# Altium PCB AdControl.PcbDoc
Units mil, origin at the board's own origin, x right, y up, seen from the top; angles counter-clockwise.
Board outline 1725 x 1850 mil, 2 copper layers (Top Layer, Bottom Layer); 49 components, 33 nets, 189 pads, 84 vias.
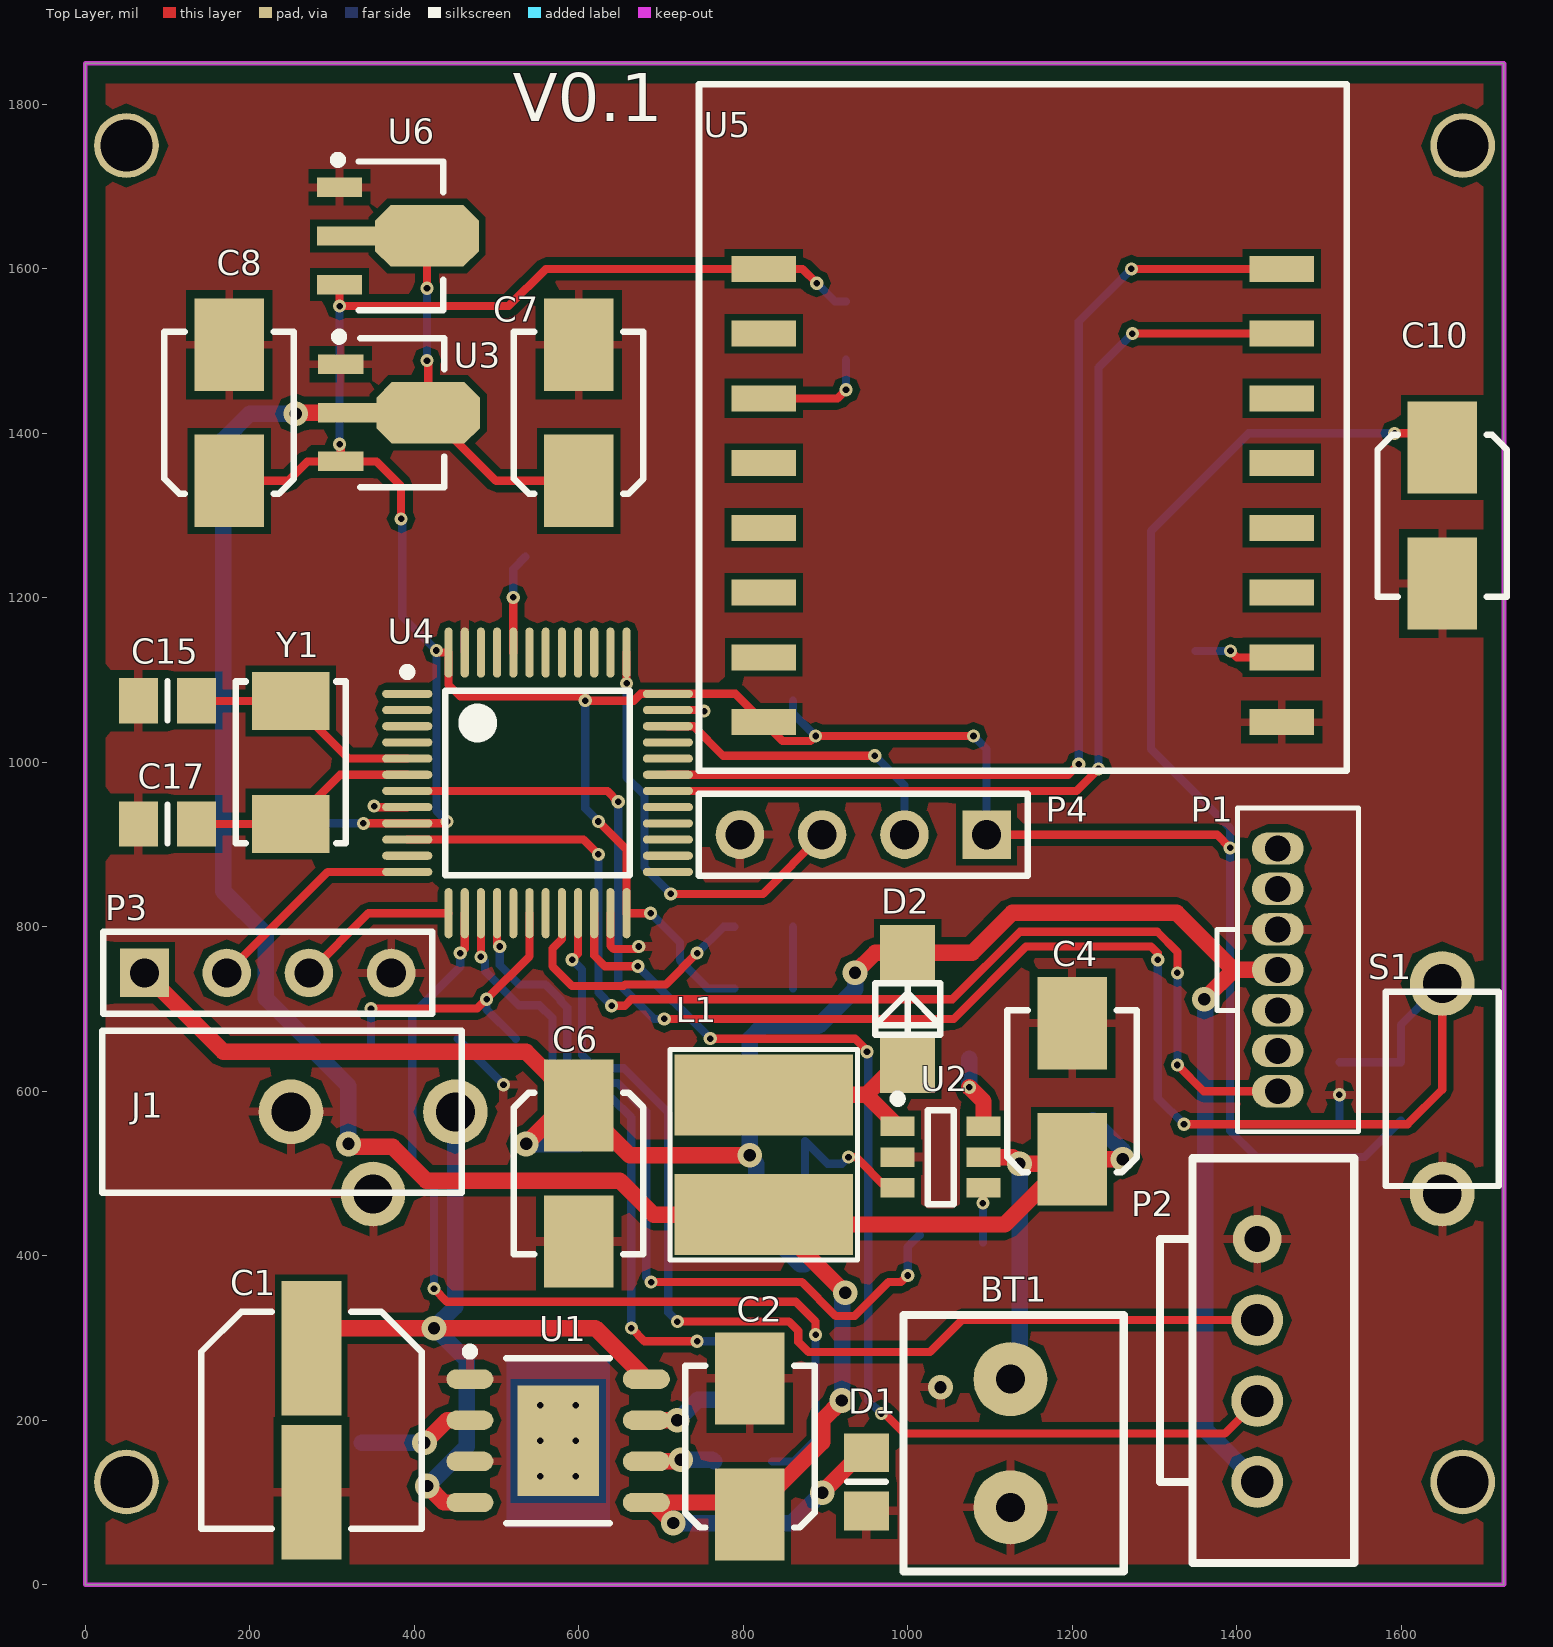
[diagram p0: Top Layer view]
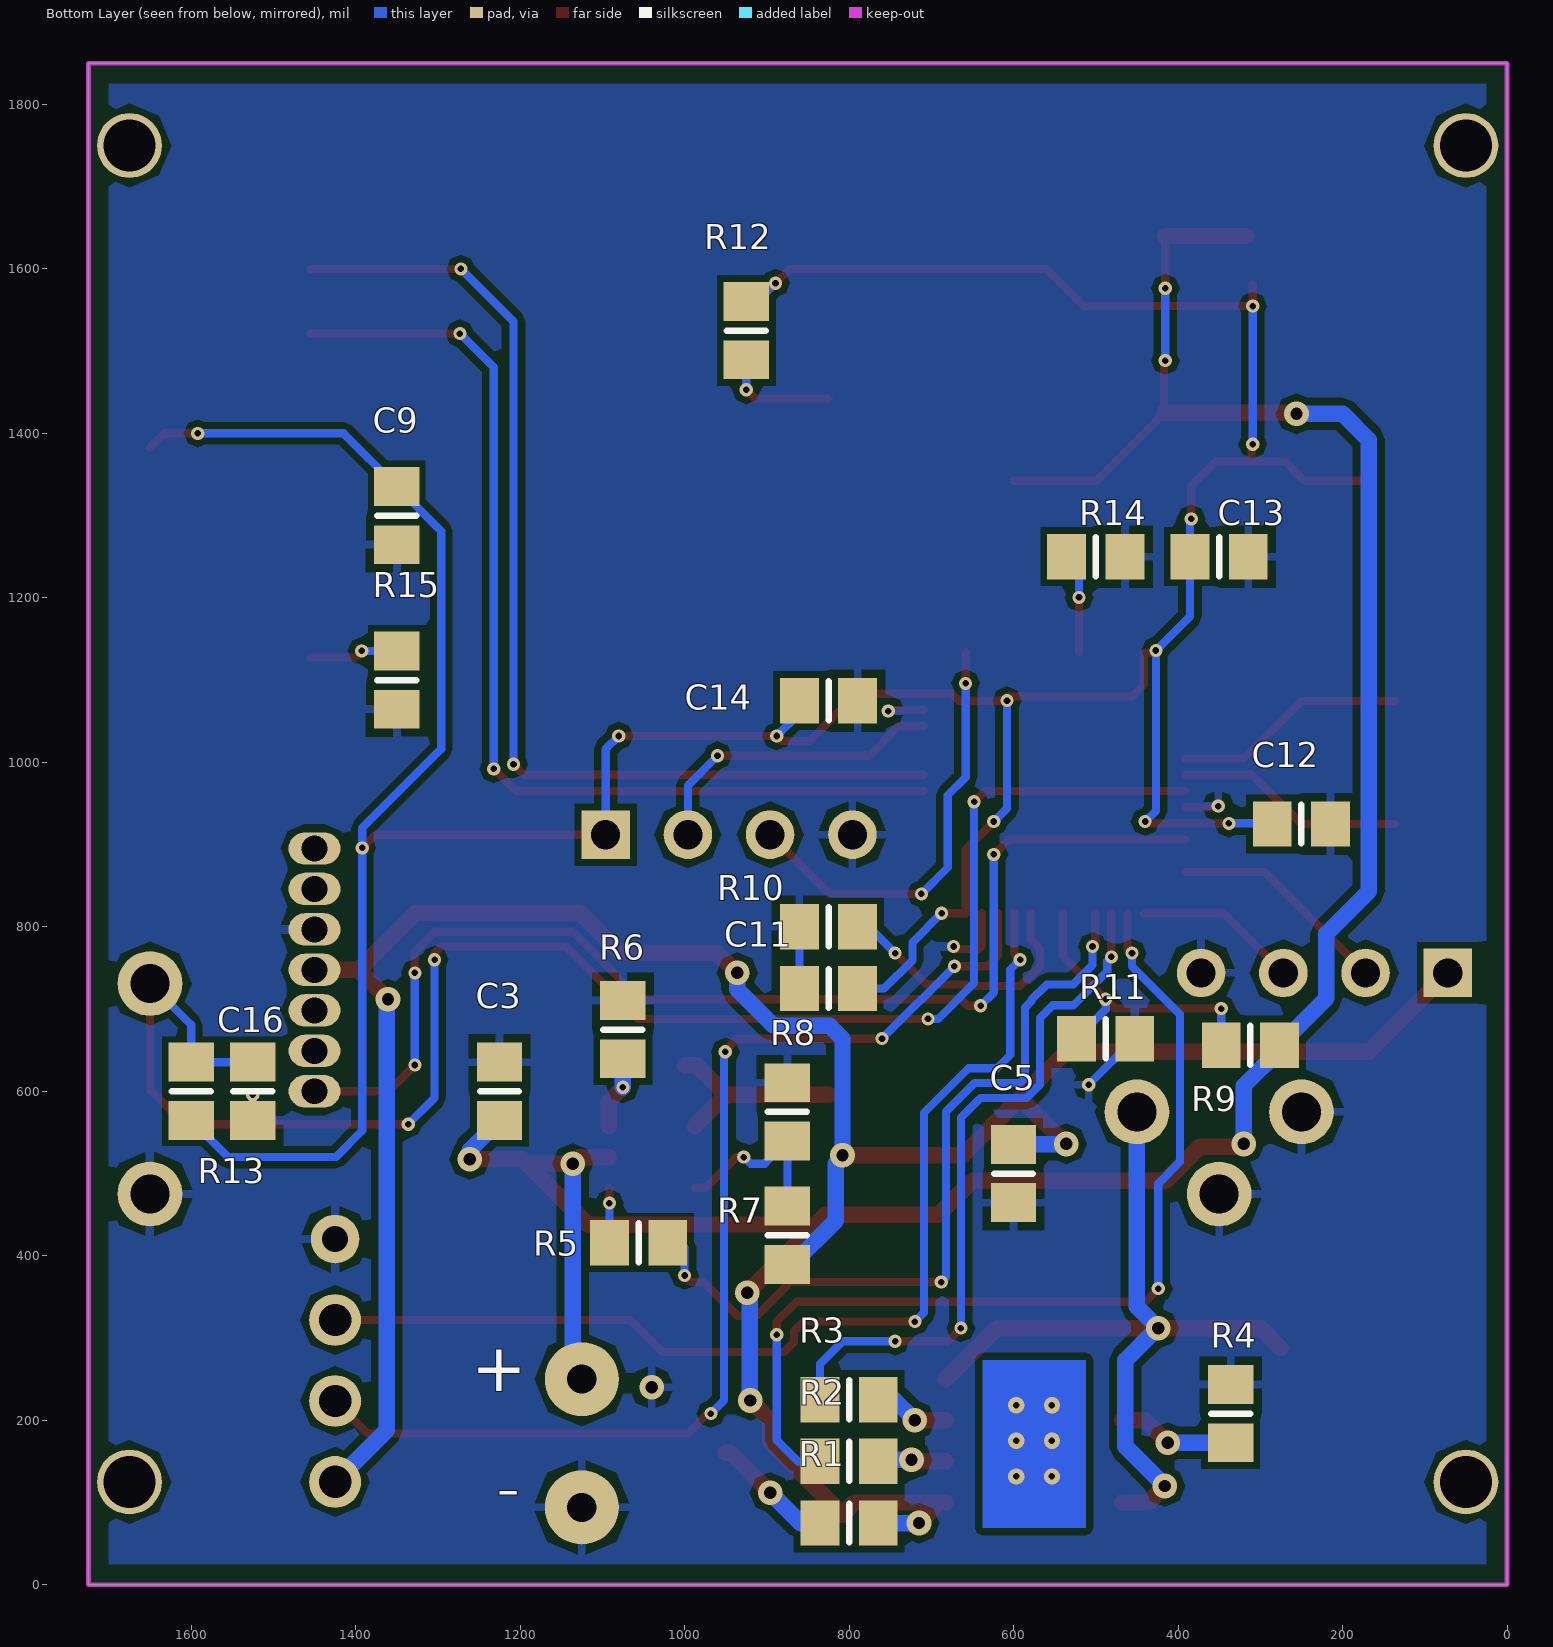
[diagram p1: Bottom Layer view, seen from below]

## Layer stack, top to bottom
Top Solder: solder mask 0.4, Solder Resist, Dk 3.5
Top Layer: signal copper 1.4
Dielectric 1: dielectric 12.6, FR-4, Dk 4.8
Bottom Layer: signal copper 1.4
Bottom Solder: solder mask 0.4, Solder Resist, Dk 3.5

## Board outline
0,0 0,1850 1725,1850 1725,0

## Design rules (kind name [scope] priority, off if disabled: settings)
Clearance [All] p1: gap=8
MinimumSolderMaskSliver [All] p1: minsoldermaskwidth=0
PolygonConnect [All] p1: connectstyle=Relief reliefconductorwidth=10 reliefentries=4 polygonreliefangle="90 Angle" airgapwidth=10
RoutingVias [All] p1: holewidth=8 width=8 viastyle="Through Hole" minholewidth=8 minwidth=15 maxholewidth=100 maxwidth=1000
SilkToSilkClearance [All] p1: silktosilkclearance=0
SilkToSolderMaskClearance [IsPad] p1: minsilkscreentomaskgap=0 clearancetoexposedcopper=TRUE
SolderMaskExpansion [All] p1: expansion=4
UnpouredPolygon [All] p1: allowunpoured=FALSE
Width [All] p1: maxlimit=1000 minlimit=8 preferedwidth=8
26 further rules are at their usual default settings.

## Components (designator, comment, footprint, x,y, rotation, side; value= is the part's Value field where it differs from the comment)
BT1 "Battery" KF3.96_2P 1125,250 r0 top
C1 "Cap Pol1" CAP_6.3*5.4MM 275,200 r270 top
C2 "Cap Pol1" Cap_5*4mm 808,168 r90 top
C3 "Cap Semi" 6-0805_N 1225,600 r90 bottom
C4 "Cap Pol1" Cap_5*4mm 1200,600 r90 top
C5 "Cap Semi" 6-0805_N 600,500 r270 bottom
C6 "Cap Pol1" Cap_5*4mm 600,500 r270 top
C7 "Cap Pol1" Cap_5*4mm 600,1425 r90 top
C8 "Cap Pol1" Cap_5*4mm 175,1425 r90 top
C9 "Cap Semi" 6-0805_N 1350,1300 r270 bottom
C10 "Cap Pol1" Cap_5*4mm 1650,1300 r270 top
C11 "Cap Semi" 6-0805_N 825,725 r0 bottom
C12 "Cap Semi" 6-0805_N 250,925 r180 bottom
C13 "Cap Semi" 6-0805_N 350,1250 r180 bottom
C14 "Cap Semi" 6-0805_N 825,1075 r180 bottom
C15 "Cap Semi" 6-0805_N 100,1075 r180 top
C16 "Cap Semi" 6-0805_N 1525,600 r90 bottom
C17 "Cap Semi" 6-0805_N 100,925 r180 top
D1 "PWR" 6-0805_N 950,125 r270 top
D2 "Diode US1M" US1M 1000,700 r90 top
J1 "PWR2.5" KLD-3.5-1.3mm 450,575 r0 top
L1 "Inductor Iron CD45" CD54_Inductor 825,450 r90 top
P1 "CO2 MH-Z14A" 1.25Connector 1450,600 r90 top
P2 "HIM" XH2.54-4P 1425,125 r90 top
P3 "UART_Debug_Port" HDR1X4 72,744 r0 top
P4 "Debug_Port" HDR1X4 1096,912 r180 top
R1 "Res3" 6-0805_N 800,75 r0 bottom
R2 "Res3" 6-0805_N 800,150 r0 bottom
R3 "Res3" 6-0805_N 800,225 r0 bottom
R4 "Res3" 6-0805_N 336,208 r90 bottom
R5 "Res3" 6-0805_N 1056,416 r0 bottom
R6 "Res3" 6-0805_N 1075,675 r90 bottom
R7 "Res3" 6-0805_N 875,425 r90 bottom
R8 "Res3" 6-0805_N 875,575 r90 bottom
R9 "Res3" 6-0805_N 312,656 r0 bottom
R10 "Res3" 6-0805_N 825,800 r0 bottom
R11 "Res3" 6-0805_N 488,664 r180 bottom
R12 "Res3" 6-0805_N 925,1525 r90 bottom
R13 "Res3" 6-0805_N 1600,600 r90 bottom
R14 "Res3" 6-0805_N 500,1250 r180 bottom
R15 "Res3" 6-0805_N 1350,1100 r270 bottom
S1 "Reset" SWP_PB_6.5mm 1650,475 r90 top
U1 "TP4056" Power_SOP8 575,175 r0 top
U2 "FP6291" SOT23-6L 1040,520 r0 top
U3 "HT7333-SOT89" SOT89_N 385.43,1425 r0 top
U4 "STM32F103C8T6" STM-LQFP48_L 550,975 r0 top
U5 "ESP-07" ESP-07_Wifi 825,1600 r0 top
U6 "HT7333-SOT89" SOT89_N 384,1640 r0 top
Y1 "XTAL" OSC_5032_2Pin 250,925 r90 top

## Footprints (in the part's own frame and the unit in brackets; to place one, negate y for a bottom-side part, rotate by r counter-clockwise, add the part's x,y. Pads: shape width x height; smd on the part's side, far side on the other; paste and mask are expansions set on the pad)
1.25Connector [mm]
  oval 1x1.6 hole 0.8: 1(0,0) 2(1.25,0) 3(2.5,0) 4(3.75,0) 5(5,0) 6(6.25,0) 7(7.5,0)
  silkscreen extent -1.25,-2.5 8.75,1.88
6-0805_N [mm] "Chip Resistor, Body 2.0x1.2mm, IPC Medium Density"
  rect 1.2x1.4 smd: 1(-0.9,0) 2(0.9,0)
  silkscreen extent 0,-0.6 0,0.6, body extent -1.07,-0.7 1.07,0.7, height 0.7
Cap_5*4mm [mm]
  rect 2.85x2.15 smd: 1(-2.1,0) 2(2.1,0)
  silkscreen extent -2.5,-2 2.5,2, body extent -2.5,-2 2.5,2, height 6
CAP_6.3*5.4MM [mm] "Aluminum Electrolytic Capacitor, Body 6.50x6.60x5.40mm, IPC Low Density"
  rect 4.15x1.85 smd: 1(-2.225,0) 2(2.225,0)
  silkscreen extent -3.35,-3.4 3.35,3.4, body extent -3.35,-3.4 3.35,3.4, height 5.4
CD54_Inductor [mm] "CD54 Inductor"
  rect 2.5x5.5 smd: 1(0,0) 2(3.7,0)
  silkscreen extent -1.4,-2.9 5.1,2.9
ESP-07_Wifi [mm]
  rect 2x0.8 smd: 1(0,0) 2(0,-2) 3(0,-4) 4(0,-6) 5(0,-8) 6(0,-10) 7(0,-12) 8(0,-14) 9(16,-14) 10(16,-12) 11(16,-10) 12(16,-8) 13(16,-6) 14(16,-4) 15(16,-2) 16(16,0)
  silkscreen extent -2,-15.5 18,5.7
HDR1X4 [mm] "Connector; Header; 4 Position"
  rect 1.5x1.5 hole 0.9: 1(0,0)
  round 1.5 hole 0.9: 2(2.54,0) 3(5.08,0) 4(7.62,0)
  silkscreen extent -1.27,-1.27 8.89,1.27
KF3.96_2P [mil]
  round 90 hole 35.43: 1(0,0) 2(0,-155.91)
  silkscreen extent -130,-234 138,78
KLD-3.5-1.3mm [mm]
  round 2 hole 1.2: 1(0,0) 2(-5.08,0) 3(-2.54,-2.54)
  silkscreen extent -10.9,-2.5 0.2,2.5
OSC_5032_2Pin [mm]
  rect 1.8x2.4 smd: 1(0,0) 2(3.8,0)
  silkscreen extent -0.6,-1.7 4.4,1.7
Power_SOP8 [mm] "SOP, 8-Leads, Body 4.90x3.90mm, Pitch 1.27mm, Thermal Pad 3.41x2.52mm, IPC Medium Density"
  oval 1.45x0.6 smd: 1(-2.725,1.905) 2(-2.725,0.635) 3(-2.725,-0.635) 4(-2.725,-1.905) 5(2.725,-1.905) 6(2.725,-0.635) 7(2.725,0.635) 8(2.725,1.905)
  rect 2.52x3.41 smd: 9(0,0)
  Bottom Layer region: -1.6,-2.7 1.6,-2.7 1.6,2.5 -1.6,2.5
  silkscreen extent -2.85,-2.55 1.6,2.88, body extent -2,-2.55 2,2.55, height 1.75
SOT23-6L [mm] "SOT23, 6-Leads, Body 2.90x2.80mm, Pitch 0.95mm, IPC Medium Density"
  rect 1.05x0.6 smd: 1(-1.325,0.95) 2(-1.325,0) 3(-1.325,-0.95) 4(1.325,-0.95) 5(1.325,0) 6(1.325,0.95)
  silkscreen extent -1.45,-1.45 0.4,1.92, body extent -0.8,-1.45 0.8,1.45, height 1.45
SOT89_N [mm] "SOT89, 3-Leads, Body 4.5x2.4 mm, Pitch 1.5mm, Lead Span 4.1mm, IPC Medium Density"
  rect 1.4x0.6 smd: 1(-1.9,1.5) 3(-1.9,-1.5)
  rect 1.8x0.6 smd: 2(-1.7,0)
  oct 3.2x1.9 smd: 2(0.8,0)
  silkscreen extent -2.07,-2.3 1.3,2.47, body extent -1.3,-2.3 1.29,2.3, height 1.6
STM-LQFP48_L [mm] "QFP, 48-Leads, Body 7x7mm, Pitch 0.5mm, IPC High Density"
  oval 1.55x0.25 smd: 1(-4.025,2.75) 2(-4.025,2.25) 3(-4.025,1.75) 4(-4.025,1.25) 5(-4.025,0.75) 6(-4.025,0.25) 7(-4.025,-0.25) 8(-4.025,-0.75) 9(-4.025,-1.25) 10(-4.025,-1.75) 11(-4.025,-2.25) 12(-4.025,-2.75) 25(4.025,-2.75) 26(4.025,-2.25) 27(4.025,-1.75) 28(4.025,-1.25) 29(4.025,-0.75) 30(4.025,-0.25) 31(4.025,0.25) 32(4.025,0.75) 33(4.025,1.25) 34(4.025,1.75) 35(4.025,2.25) 36(4.025,2.75)
  oval 0.25x1.55 smd: 13(-2.75,-4.025) 14(-2.25,-4.025) 15(-1.75,-4.025) 16(-1.25,-4.025) 17(-0.75,-4.025) 18(-0.25,-4.025) 19(0.25,-4.025) 20(0.75,-4.025) 21(1.25,-4.025) 22(1.75,-4.025) 23(2.25,-4.025) 24(2.75,-4.025) 37(2.75,4.025) 38(2.25,4.025) 39(1.75,4.025) 40(1.25,4.025) 41(0.75,4.025) 42(0.25,4.025) 43(-0.25,4.025) 44(-0.75,4.025) 45(-1.25,4.025) 46(-1.75,4.025) 47(-2.25,4.025) 48(-2.75,4.025)
  silkscreen extent -4.15,-2.85 2.85,3.55, body extent -3.5,-3.5 3.5,3.5, height 1.6
SWP_PB_6.5mm [mm]
  round 2 hole 1.2: 1(0,0) 2(6.5,0)
  silkscreen extent 0.25,-1.75 6.25,1.75
US1M [mm]
  rect 1.7x1.7 smd: 1(-1.74,0) 2(1.74,0)
  silkscreen extent -0.8,-1 0.8,1
XH2.54-4P [mm]
  round 1.6 hole 1: 1(0,0) 2(2.5,0) 3(5,0)
  round 1.5 hole 0.8: 4(7.5,0)
  silkscreen extent -2.5,-3 10,3

## Part data
BT1: "Multicell Battery"
C1 C2 C4 C6 C7 C8 C10: "Polarized Capacitor (Radial)"
C3 C5 C9 C11 C12 C13 C14 C15 C16 C17: "Capacitor (Semiconductor SIM Model)"
D1: library part LED0, "Typical INFRARED GaAs LED"
D2: library part "Diode BAT17", "Silicon RF Schottky Diode for Mixer Applications in the VHF/UHF Range"
J1: "Low Voltage Power Supply Connector"
L1: library part "Inductor Iron", "Magnetic-Core Inductor"
P1: library part "Header 7", "Header, 7-Pin"
P2: library part XH2.54-4P
P3 P4: library part "Header 4", "Header, 4-Pin"
R1 R2 R3 R4 R5 R6 R7 R8 R9 R10 R11 R12 R13 R14 R15: "Resistor"
S1: library part SW-PB, "Switch"
U3 U6: library part CMP-0204-00157-1, "Low Power Consumption LDO, Output Voltage 3.3V, SOT89 Pkg"
U4: library part CMP-0237-00215-3, "ARM Cortex-M3 32-bit MCU, 64 KB Flash, 20 KB Internal RAM, 37 I/Os, 48-pin LQFP, -40 to 85 degC, Tray"
U5: library part ESP-07_Wifi
Y1: "Crystal Oscillator"

## Free pads (board coordinates)
  round 78.74 hole 62.99: 0(50,125) 0(50,1750) 0(1675,125) 0(1675,1750)

## Via types
v1: diameter 16, hole 8, Top Layer to Bottom Layer, tented both sides, 60 vias
v2: diameter 30, hole 15, Top Layer to Bottom Layer, tented both sides, 18 vias
v3: diameter 19.68, hole 7.87, Top Layer to Bottom Layer, tented both sides, 6 vias

## Nets (pads, with @x,y where several pads share a name; then routed paths per layer and width w, separated by ;. In a path a pad name is that pad's centre, name@x,y a point inside that pad or via, vN(x,y) a via of type N, cw(c..) or ccw(c..) an arc to the next point about the centre after c; other vN are vias at no path point)
+3.3V: C8.1 C9.1 C10.1 C11.1 C12.1 C13.1 C14.1 P4.1 R12.2 R13.1 U3.3 U4.9 U4.24 U4.36 U4.48 U5.1 U5.8 U6.3 | length 4772.6
  Top Layer w10: C8.1 246.32,1342.32 269.94,1365.94 U3.3 ; v1(309.2,1386.8) 310.63,1385.37 U3.3 ; U6.3 v1(309.2,1554.8) 514.8,1554.8 560,1600 U5.1 872,1600 v1(889.44,1582.56) ; v1(338.21,925.79) U4.9 437.79,925.79 v1(440,928) ; v1(384,1296) 384,1336 354.06,1365.94 U3.3 ; v1(426.93,1136) 429.46,1133.46 U4.48 441.73,1094.27 456,1080 v1@608,1080 ; v1@613,1075 666.97,1075 675.23,1083.27 U4.36 790.55,1083.27 U5.8 847.82,1026 882,1026 v1(888,1032) v1(1080,1032) ; v1(624,928) 658.27,893.73 U4.24 v1(687.46,816.54) ; P4.1 1376,912 v1(1392,896) ; v1(1592,1400) 1632.68,1400 C10.1
  Bottom Layer w10: C12.1 286.22,925.79 v1(338.21,925.79) ; v1(309.2,1386.8) v1(309.2,1554.8) ; v1(384,1296) 385.43,1294.57 C13.1 385.43,1177.5 v1(426.93,1136) 426.93,941.07 v1(440,928) ; v1(608,1075) 608,944 v1(624,928) ; v1(687.46,816.54) 723,781 723,759.3 757.3,725 C11.1 ; C14.1 860.43,1059.57 v1(888,1032) ; v1(889.44,1582.56) 911.57,1560.43 R12.2 ; v1(1080,1032) 1096,1016 P4.1 ; v1(1592,1400) 1414.57,1400 C9.1 1296,1281.43 1296,1016 1392,920 v1(1392,896) 1392,552 1424,520 1555.43,520 R13.1
+5V: C5.1 C6.1 D2.2 P1.4 P2.1 P3.1 R7.1 | length 2673.2
  Top Layer w20: P3.1 168,648 536,648 C6.1@592,592 ; v2(536,536) C6.1@592,592 ; v2(808,522.21) 661.79,522.21 C6.1@592,592 ; v2(936,744) 960.5,768.5 D2.2 1078.52,768.5 1127.02,817 1327,817 1396.36,747.64 ; v2(1360.72,712) 1396.36,747.64 ; P1.4 1396.36,747.64
  Bottom Layer w20: v2(536,536) 536.57,535.43 C5.1 ; v2(808,522.21) 808,664 823.44,679.44 891.51,679.44 936,723.93 v2(936,744) ; v2@816,512 816,442.8 869.23,389.57 R7.1 ; v2(1360.72,712) 1362,710.72 1362,188 P2.1
+5V_IN: C1.1 J1.1 U1.4 U1.8 | length 1005.9
  Top Layer w20: C1.1 299.4,312 v2(424,312) 620.28,312 U1.8 ; v2(416,120) 436,100 U1.4
  Bottom Layer w20: v2(416,120) 464,168 464,273.07 425.07,312 v2(424,312) 450,338 J1.1
C\H\R\G\: R3.2 U4.15 | length 860.7
  Top Layer w10: v1(481.1,763.4) U4.15 ; v1(664,312) 680,296 v1(744,296)
  Bottom Layer w10: v1(481.1,763.4) 486,758.51 486,746 527.44,704.56 552.44,704.56 568,689 568,608 584,592 640,592 664,568 v1(664,312) ; v1(744,296) 808,296 835.43,268.57 R3.2
CO2PWM: P1.1 U4.10 | length 1438.7
  Top Layer w10: U4.10 605.9,906.1 v1(624,888) ; v1(640,704) 656,704 664,712 1054.54,712 1136.54,794 1303.46,794 1328,769.46 v1(1328,744) ; v1(1328,632) 1360,600 P1.1
  Bottom Layer w10: v1(624,888) 624,720 v1(640,704) ; v1(1328,632) v1(1328,744)
DEBUG_RX: P3.3 U4.13 | length 199.8
  Top Layer w10: P3.3 344.54,816.54 U4.13
DEBUG_TX: P3.2 U4.12 | length 270.4
  Top Layer w10: P3.2 294.73,866.73 U4.12
FP6291EN: R5.1 U4.16 | length 981.7
  Top Layer w10: U4.16 500.79,779.21 v1(504,776) ; v1(688,368) 871.26,368 912.4,326.86 935.6,326.86 976.74,368 992,368 v1(1000,376)
  Bottom Layer w10: v1(504,776) 504,753.46 527.46,730 559.46,730 578.06,711.4 578.06,709.94 586,702 586,616 592,610 647.46,610 682,575.46 682,374 v1(688,368) ; v1(1000,376) 1000,410.43 R5.1@1014.57,425
GND: BT1.2 C1.2 C2.2 C3.2 C4.2 C5.2 C6.2 C7.2 C8.2 C9.2 C10.2 C11.2 C12.2 C13.2 C14.2 C15.2 C16.1 C17.2 D1.2 J1.2 J1.3 P1.5 P2.4 P3.4 P4.4 R4.2 R6.2 R8.2 R10.2 R11.2 R14.2 R15.2 S1.1 U1.1 U1.3 U2.2 U3.1 U4.8 U4.23 U4.35 U4.47 U5.9 U6.1 | length 349.6
  Top Layer w10: v1(351.15,946.79) 352.47,945.47 U4.8 ; U4.23 638.58,776.91 642.47,773.02 669.93,773.02 v1(672.91,776) ; U4.35 751.1,1063.58 v1(752.42,1062.27)
  Bottom Layer w10: v1@349.21,946.79 v1(351.15,946.79) ; R11.2 v1(508.57,608) ; C11.2 R10.2 ; C16.1 v1(1525,595.81)
  other v2: 1040,240
HIMRXD: P2.3 U4.21 | length 1317.1
  Top Layer w10: v1(592,760) 599.21,767.21 U4.21 ; v1(720,320) 855.49,320 867,308.49 867,295.3 879.3,283 1027,283 1065.85,321.85 P2.3
  Bottom Layer w10: v1(592,760) 604,748 604,644 620,628 654.91,628 709,573.91 709,331 v1(720,320)
HIMTXD: P2.2 U4.22 | length 1362.3
  Top Layer w10: U4.22 618.9,765.1 632,752 v1(672,752) ; v1(760,664) 936,664 950.54,649.46 v1(950.54,648) ; v1(968,208) 972,208 996,184 1385.57,184 P2.2
  Bottom Layer w10: v1(672,752) v1(760,664) ; v1@952,648 952,224 v1(968,208)
NetC15_1: C15.1 U4.5 Y1.2 | length 285.3
  Top Layer w10: C15.1 135.83,1074.61 Y1.2 320.08,1004.53 U4.5
NetC16_2: C16.2 R13.2 S1.2 U4.7 | length 2068.9
  Top Layer w10: U4.7 634.84,965.16 v1(648,952) ; v1(704,688) 1056,688 1144,776 1296,776 1304,768 v1(1304,760) ; v1(1336,560) 1608,560 1650,602 S1.2
  Bottom Layer w10: v1(648,952) 648,731.56 691.56,688 v1(704,688) ; v1(1304,760) 1304,592 v1(1336,560) ; C16.2 R13.2 1600,680.91 S1.2
NetC17_1: C17.1 U4.6 Y1.1 | length 280.9
  Top Layer w10: C17.1 Y1.1 309.84,984.84 U4.6
NetD1_1: D1.1 R1.2 | length 150.1
  Top Layer w20: v2(896,112) 896,112.2 944.23,160.43 D1.1
  Bottom Layer w20: R1.2 859,75 v2(896,112)
NetD2_1: D2.1 L1.2 U2.1 | length 244
  Top Layer w20: L1.2 949.57,595.67 ; U2.1 949.57,595.67 ; D2.1 985.39,631.5 949.57,595.67
NetR2_1: R2.1 U1.6 | length 83.9
  Top Layer w20: U1.6 722,150 v2(724,152)
  Bottom Layer w20: v2(724,152) 762.57,152 R2.1
NetR3_1: R3.1 U1.7 | length 92.6
  Top Layer w20: U1.7 v2(720,200)
  Bottom Layer w20: v2(720,200) 745,225 R3.1
NetR4_1: R4.1 U1.2 | length 143.1
  Top Layer w20: v2(412.57,172.57) 440,200 U1.2
  Bottom Layer w20: R4.1 v2(412.57,172.57)
NetR5_2: R5.2 U2.4 | length 66.9
  Top Layer w10: v1(1091.43,464) 1091.43,481.87 U2.4
  Bottom Layer w10: R5.2 v1(1091.43,464)
NetR6_1: R6.1 U2.6 | length 89.3
  Top Layer w20: v1(1075,605) 1092.17,587.83 U2.6
  Bottom Layer w20: v1(1075,605) R6.1
NetR7_2: R7.2 R8.1 U2.3 | length 222.2
  Top Layer w10: v1(928,520) 936.97,520 974.37,482.6 U2.3
  Bottom Layer w10: R7.2 R8.1 902.57,512 920,512 v1(928,520)
NetR9_2: R9.2 R11.1 U4.18 | length 378.7
  Top Layer w10: v1(347.43,700.57) 476.57,700.57 v1(488,712) 540.16,764.16 U4.18
  Bottom Layer w10: R9.2 v1(347.43,700.57) ; v1(488,712) 488,699.43 R11.1
NetR10_1: R10.1 U4.20 | length 330.6
  Top Layer w10: U4.20 579.53,785.29 568,773.76 568,752 592,728 654.54,728 656.54,730 706,730 v1(744,768)
  Bottom Layer w10: v1(744,768) 776,800 R10.1
NetR12_1: R12.1 U5.3 | length 140.9
  Top Layer w10: U5.3 914.52,1442.52 v1(925,1453)
  Bottom Layer w10: v1(925,1453) R12.1
NetR14_1: R14.1 U4.44 | length 122.7
  Top Layer w10: U4.44 v1(520.47,1200.47)
  Bottom Layer w10: v1(520.47,1200.47) 520.47,1235.04 R14.1
NetR15_1: R15.1 U5.10 | length 108.2
  Top Layer w10: v1(1392.57,1135.43) 1400.44,1127.56 U5.10
  Bottom Layer w10: R15.1 v1(1392.57,1135.43)
S\T\D\B\Y\: R2.2 U4.14 | length 1181.8
  Top Layer w10: v1(424,360) 440,344 864,344 888,320 v1(888,304) ; v1(456,768) 461.42,773.42 U4.14
  Bottom Layer w10: v1(424,360) 424,488 397.63,514.37 397.63,693.63 456,752 v1(456,768) ; R2.2 862,150 888,176 v1(888,304)
SWCLK: P4.3 U4.37 | length 529.5
  Top Layer w10: v1(658.27,1096) U4.37 ; v1(712,840) 824,840 P4.3
  Bottom Layer w10: v1(658.27,1096) 658.27,981.73 680,960 680,872 v1(712,840)
SWDIO: P4.2 U4.34 | length 377.3
  Top Layer w10: U4.34 739.71,1043.9 775.61,1008 v1(960,1008)
  Bottom Layer w10: v1(960,1008) 996,972 P4.2
VB+: BT1.1 C2.1 C3.1 C4.1 C7.1 L1.1 R1.1 R9.1 U1.5 U2.5 U3.2 U6.2 | length 3835.4
  Top Layer w10: v1(415.5,1488.5) 416.93,1487.07 416.93,1425 499.61,1342.32 C7.1 ; v1(415.5,1576.5) U6.2@415.5,1640
  Top Layer w20: v2(256,1424) 257,1425 318.5,1425 U3.2@416.93,1425 ; U6.2@317.07,1640 U6.2@415.5,1640 ; v2(320,536) 323.63,532.37 373.76,532.37 414.71,491.43 649.78,491.43 691.2,450 L1.1 L1.1@828.86,450 ; U1.5 U1.5@690,100 ; v2(715,75) U1.5@690,100 ; v2(920,224) 896,200 896,173.32 C2.1 793.32,100 U1.5@690,100 ; v2(924,354.86) L1.1@828.86,450 ; U2.5 1128,520 v2(1136,512) C4.1@1192,512 ; v2(1261.32,517.32) C4.1 1197.32,517.32 C4.1@1192,512 ; L1.1@828.86,450 840.86,438 1118,438 C4.1@1192,512
  Bottom Layer w10: v1(415.5,1488.5) v1(415.5,1576.5)
  Bottom Layer w20: v2(256,1424) 200,1424 168,1392 168,843.06 219.53,791.53 219.53,713.04 R9.1 276.57,650.23 320,606.8 v2(320,536) ; v2(715,75) R1.1 ; v2(920,224) 920.56,224.56 920.56,358.3 v2(924,354.86) ; BT1.1 1136,261 v2(1136,512) ; C3.1 1261.32,528.24 v2(1261.32,517.32)
WIFI_RX: U4.30 U5.15 | length 1262.7
  Top Layer w10: U4.30 1205.16,965.16 v1(1232,992) ; v1(1273.26,1521.26) U5.15
  Bottom Layer w10: v1(1232,992) 1232,1480 v1(1273.26,1521.26)
WIFI_TX: U4.31 U5.16 | length 1316.6
  Top Layer w10: U4.31 1195.14,984.84 v1(1208,997.7) ; v1(1272,1600) U5.16
  Bottom Layer w10: v1(1208,997.7) 1208,1536 v1(1272,1600)
pads on no net: P1.2 P1.3 P1.6 P1.7 U1.9 U4.1 U4.2 U4.3 U4.4 U4.11 U4.17 U4.19 U4.25 U4.26 U4.27 U4.28 U4.29 U4.32 U4.33 U4.38 U4.39 U4.40 U4.41 U4.42 U4.43 U4.45 U4.46 U5.2 U5.4 U5.5 U5.6 U5.7 U5.11 U5.12 U5.13 U5.14
copper on no net:
  other v3: 553.35,131.69 596.65,131.69 553.35,175 596.65,175 553.35,218.31 596.65,218.31

## Polygon pours and split planes (outlines as drawn)
GND on Top Layer "TPGND" (solid, remove dead copper, pour order 2): 25,1825 25,25 1700,25 1700,1825
GND on Bottom Layer "BPGND" (solid, remove dead copper, pour order 4): 25,1825 25,25 1700,25 1700,1825

## Keep-outs
Keep-Out Layer:
  the board outline again, w6

## Silkscreen, mask and mechanical layers (free items; w line width, h text height)
Top Overlay:
  text "V0.1" at 520,1760 h100
Bottom Overlay:
  text "+" at 1192,216 h100
  text "-" at 1200,72 h100

## Dimensions
0,1854 to 0,0 on Keep-Out Layer
0,1850 to 1725,1850 on Keep-Out Layer